# Altium PCB RadiationPCB.PcbDoc
Units mm, origin at the board's own origin, x right, y up, seen from the top; angles counter-clockwise.
Board outline 100 x 100 mm, 2 copper layers (Top Layer, Bottom Layer); 4 components, 0 nets, 27 pads, 0 vias.
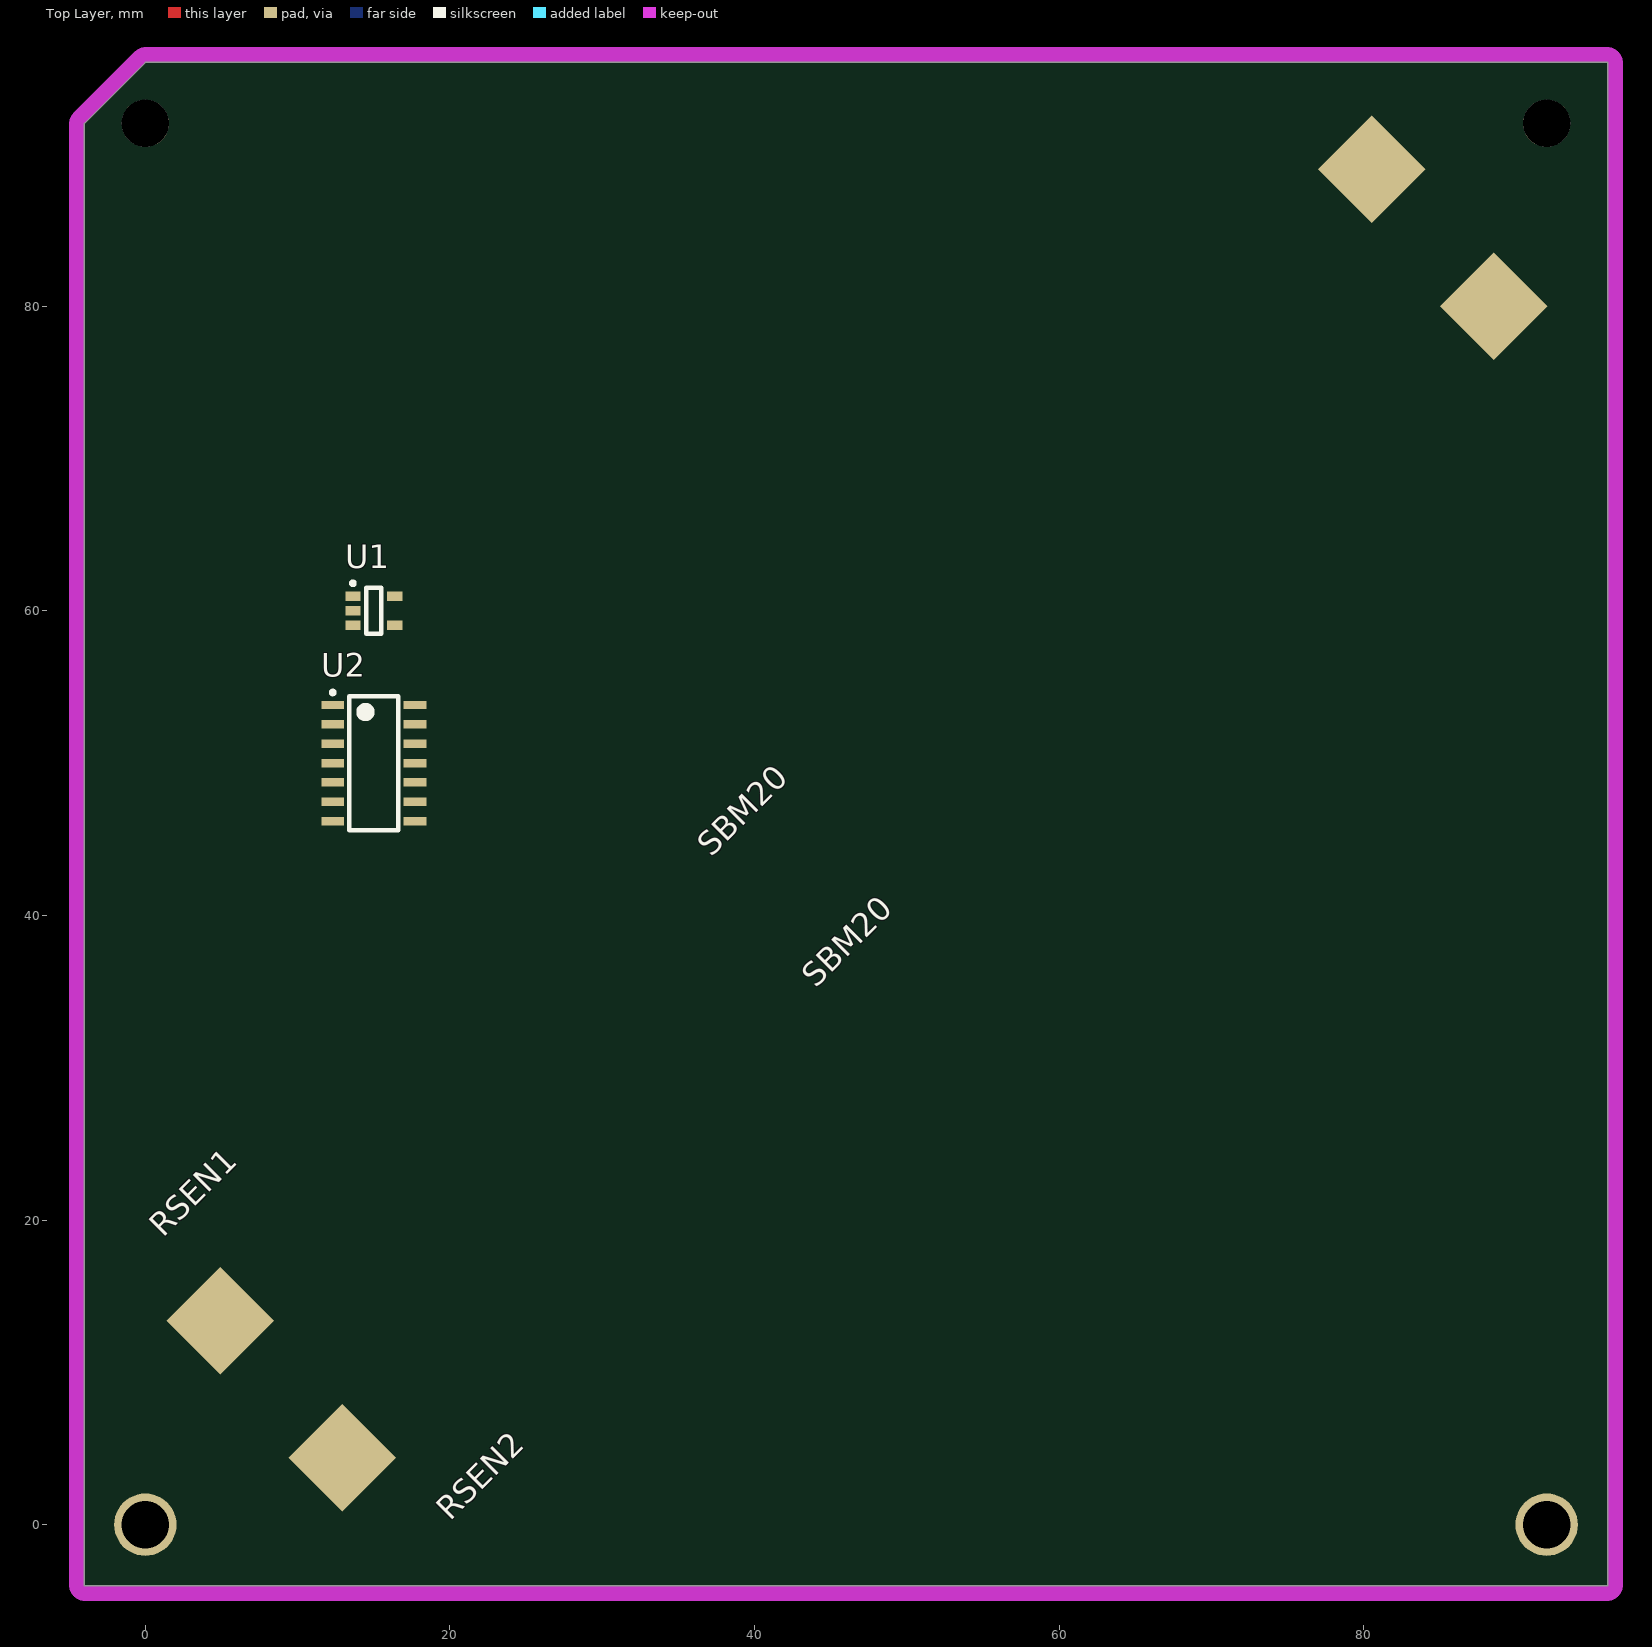
[diagram p0: Top Layer view]
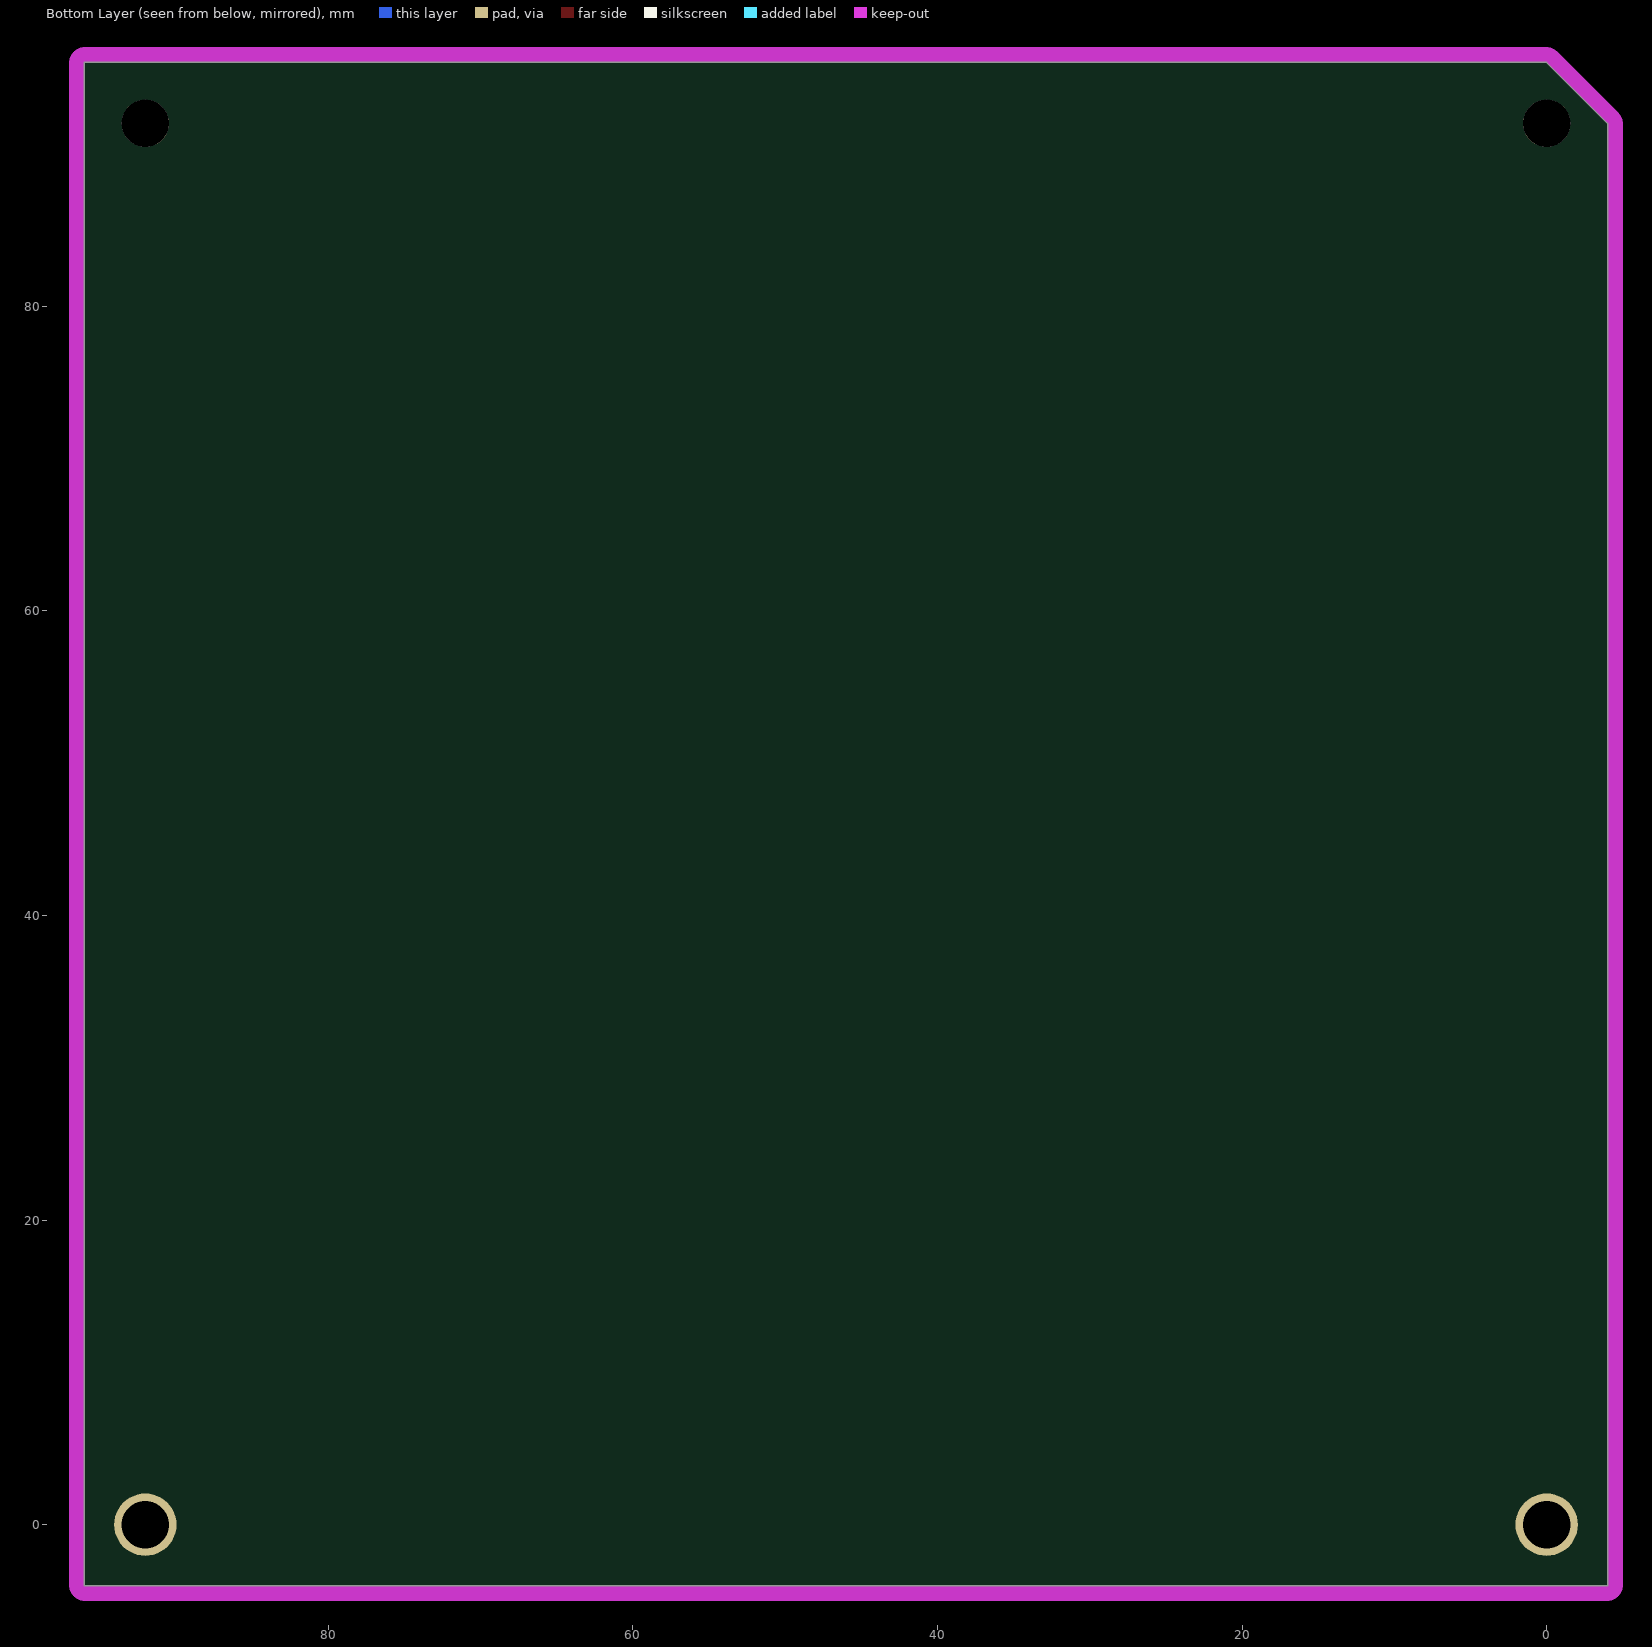
[diagram p1: Bottom Layer view, seen from below]

## Layer stack, top to bottom
Top Solder: solder mask 0.0102, Solder Resist, Dk 3.5
Top Layer: signal copper 0.0356
Dielectric 1: dielectric 0.32, FR-4, Dk 4.8
Bottom Layer: signal copper 0.0356
Bottom Solder: solder mask 0.0102, Solder Resist, Dk 3.5

## Board outline
96,96 0,96 -4,92 -4,-4 96,-4

## Design rules (kind name [scope] priority, off if disabled: settings)
Clearance [All] p1: gap=0.254
PolygonConnect [All] p1: connectstyle=Relief reliefconductorwidth=0.254 reliefentries=4 polygonreliefangle="90 Angle" airgapwidth=0.254
RoutingVias [All] p1: holewidth=0.711 width=1.27 viastyle="Through Hole" minholewidth=0.711 minwidth=1.27 maxholewidth=0.711 maxwidth=1.27
SolderMaskExpansion [All] p1: expansion=0.102
Width [All] p1: maxlimit=0.254 minlimit=0.254 preferedwidth=0.254
30 further rules are at their usual default settings.

## Components (designator, comment, footprint, x,y, rotation, side; value= is the part's Value field where it differs from the comment)
RSEN1 "SBM20" SBM20_ITS 42,51 r45 top
RSEN2 "SBM20" SBM20_ITS 50,42 r45 top
U1 "MAX4162" SOT95P280X145-5N_ITS 15,60 r0 top
U2 "SN74HC14D" SOIC127P600X175-14N_ITS 15,50 r0 top

## Footprints (in the part's own frame and the unit in brackets; to place one, negate y for a bottom-side part, rotate by r counter-clockwise, add the part's x,y. Pads: shape width x height; smd on the part's side, far side on the other; paste and mask are expansions set on the pad)
SBM20_ITS [mm]
  rect 5x5 smd: 0(-52.808,-0.385) 1(54.1,-0.385)
  body extent -52.81,-5.72 54.1,4.95, height 10.45
SOIC127P600X175-14N_ITS [mm] "SOIC, 14-Leads, Body 8,65x3,90mm, Pitch 1,27mm, IPC Medium Density"
  rect 1.5x0.55 smd: 1(-2.7,3.81) 2(-2.7,2.54) 3(-2.7,1.27) 4(-2.7,0) 5(-2.7,-1.27) 6(-2.7,-2.54) 7(-2.7,-3.81) 8(2.7,-3.81) 9(2.7,-2.54) 10(2.7,-1.27) 11(2.7,0) 12(2.7,1.27) 13(2.7,2.54) 14(2.7,3.81)
  silkscreen extent -2.82,-4.4 1.6,4.76, body extent -3,-4.4 3,4.4, height 1.75
SOT95P280X145-5N_ITS [mm] "SOT23, 5-Leads, Body 2,90x2,80mm, Pitch 0,95mm, IPC Medium Density"
  rect 1x0.6 smd: 1(-1.375,0.95) 2(-1.375,0) 3(-1.375,-0.95) 4(1.375,-0.95) 5(1.375,0.95)
  silkscreen extent -1.5,-1.5 0.5,1.92, body extent -1.5,-1.5 1.5,1.5, height 1.45

## Part data
U1: library part MAX4162_ITS
U2: library part SN74HC14D_ITS

## Free pads (board coordinates)
  round 4.1 hole 3.1: 1(0,0) 1(92,0)
  round 3.1 hole 3.1: 1(0,92) 1(92,92)

## Nets (pads, with @x,y where several pads share a name; then routed paths per layer and width w, separated by ;. In a path a pad name is that pad's centre, name@x,y a point inside that pad or via, vN(x,y) a via of type N, cw(c..) or ccw(c..) an arc to the next point about the centre after c; other vN are vias at no path point)
pads on no net: RSEN1.0 RSEN1.1 RSEN2.0 RSEN2.1 U1.1 U1.2 U1.3 U1.4 U1.5 U2.1 U2.2 U2.3 U2.4 U2.5 U2.6 U2.7 U2.8 U2.9 U2.10 U2.11 U2.12 U2.13 U2.14

## Keep-outs
Keep-Out Layer:
  lines w1: -4.5,-4 ccw(c-4,-4) -4,-4.5 ; -4.5,-4 ccw(c-4,-4) -4,-4.5 ; -4.5,-4 -4.5,92 ; -4.5,92 cw(c-4,92) -4.353,92.354 ; -4.5,92 cw(c-4,92) -4.354,92.354 -4.353,92.354 ; -4.353,92.354 -0.354,96.353 ; -4,-4.5 96,-4.5 ; -0.354,96.353 cw(c0,96) 0,96.5 ; -0.354,96.353 -0.354,96.354 cw(c0,96) 0,96.5 ; 0,96.5 96,96.5 ; 96,-4.5 ccw(c96,-4) 96.5,-4 ; 96,-4.5 ccw(c96,-4) 96.5,-4 ; 96,96.5 cw(c96,96) 96.5,96 ; 96,96.5 cw(c96,96) 96.5,96 ; 96.5,-4 96.5,96